# Altium PCB PCB1.PcbDoc
Units mm, origin at the board's own origin, x right, y up, seen from the top; angles counter-clockwise.
Board outline 152.4 x 101.6 mm, 2 copper layers (Top Layer, Bottom Layer); 89 components, 62 nets, 374 pads, 50 vias.
Unrouted connection lines stored in the file: 221.
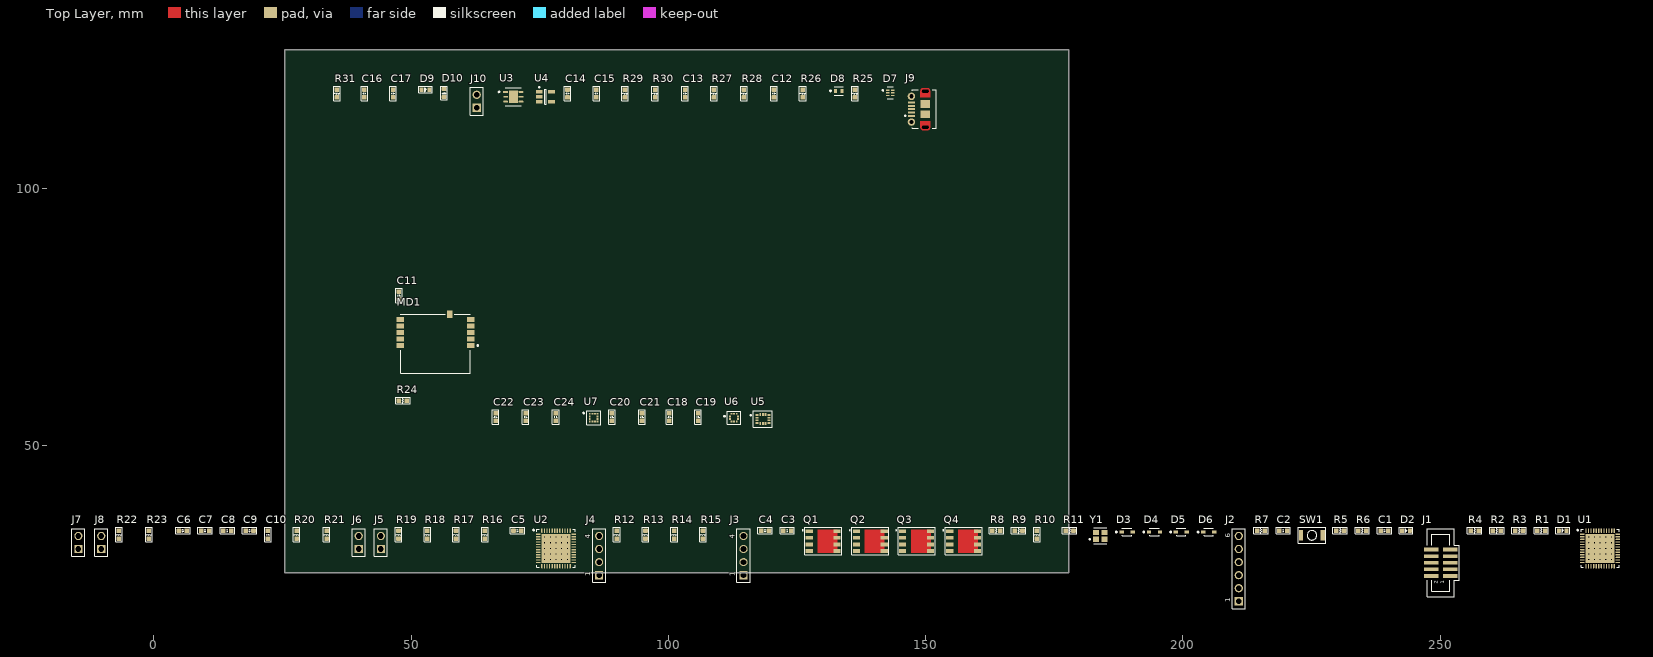
[diagram p0: Top Layer view]
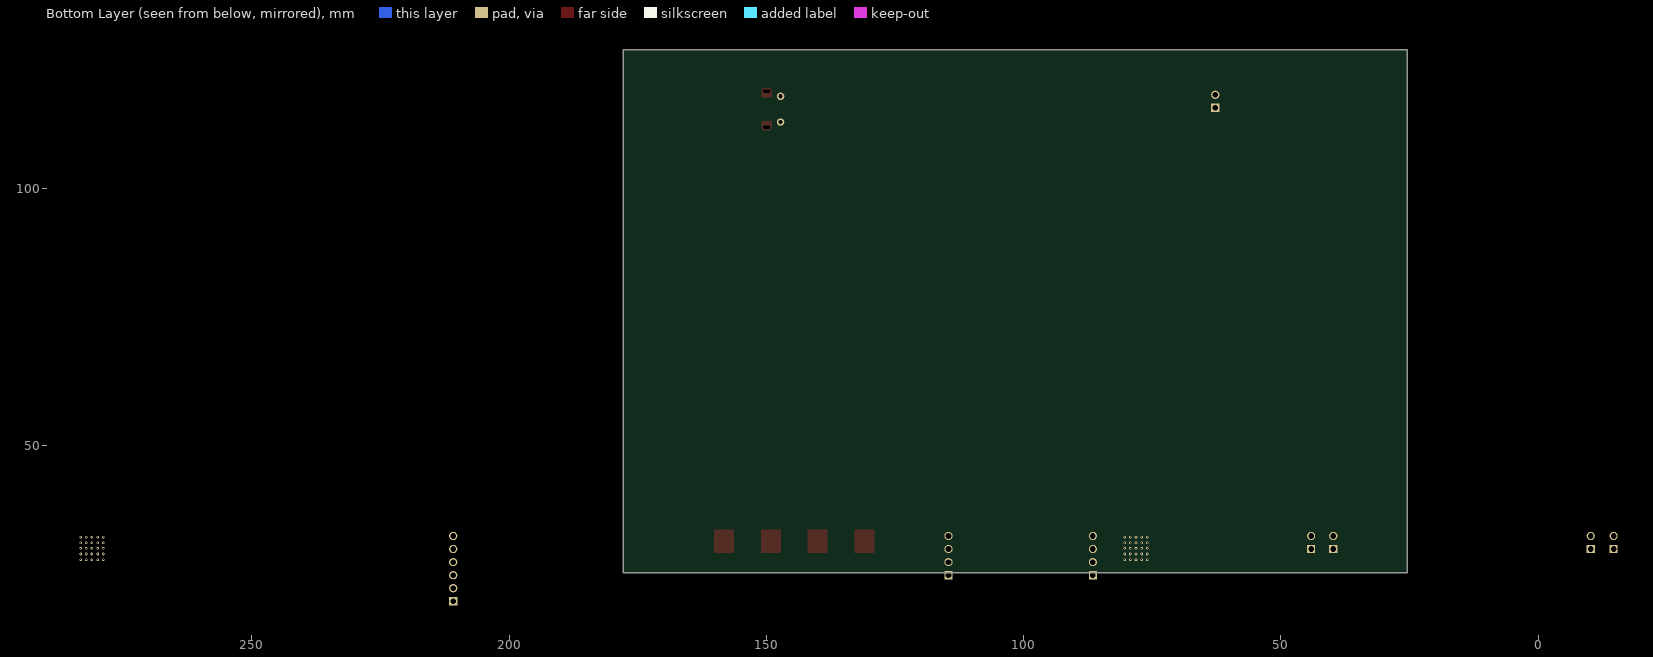
[diagram p1: Bottom Layer view, seen from below]

## Layer stack, top to bottom
Top Solder: solder mask 0.0102, Solder Resist, Dk 3.5
Top Layer: signal copper 0.0356
Dielectric 1: dielectric 0.32, FR-4, Dk 4.8
Bottom Layer: signal copper 0.0356
Bottom Solder: solder mask 0.0102, Solder Resist, Dk 3.5

## Board outline
25.4,25.4 177.8,25.4 177.8,127 25.4,127

## Design rules (kind name [scope] priority, off if disabled: settings)
Clearance [All] p1: gap=0.254 ignorepadtopadclearanceinfootprint=FALSE except(0: Arc-Hole Track-Hole SMDPad-Hole THPad-Hole Via-Hole Fill-Hole Poly-Hole Region-Hole Text-Hole)
PolygonConnect [All] p1: connectstyle=Relief reliefconductorwidth=0.254 reliefentries=4 polygonreliefangle="90 Angle" airgapwidth=0.254
RoomDefinition USB_BAT [InComponentClass('USB_BAT')] p1: confinementstyle=ConfineIn formatcopy=TRUE lockcomponents=FALSE outline 34.671,107.975 152.781,107.975 152.781,122.707 34.671,122.707
RoomDefinition SPBTLE-RF_BlueTooth_Module [InComponentClass('SPBTLE-RF_BlueTooth_Module')] p2: confinementstyle=ConfineIn formatcopy=TRUE lockcomponents=FALSE outline 63.373,57.912 63.373,81.788 44.196,81.788 44.196,57.912
RoomDefinition Sensor [InComponentClass('Sensor')] p3: confinementstyle=ConfineIn formatcopy=TRUE lockcomponents=FALSE outline 65.532,53.213 120.65,53.213 120.65,59.817 65.532,59.817
RoomDefinition Main_Sheet [InComponentClass('Main_Sheet')] p4: confinementstyle=ConfineIn formatcopy=TRUE lockcomponents=FALSE outline 0,17.907 301.752,17.907 301.752,36.957 0,36.957
RoutingVias [All] p1: holewidth=0.711 width=1.27 viastyle="Through Hole" minholewidth=0.711 minwidth=1.27 maxholewidth=0.711 maxwidth=1.27
SolderMaskExpansion [All] p1: expansion=0.102 istentingtop=FALSE
Width [All] p1: maxlimit=0.254 minlimit=0.254 preferedwidth=0.254
30 further rules are at their usual default settings.

## Classes and differential pairs
component class USB_BAT: C12 C13 C14 C15 C16 C17 D7 D8 D9 D10 J9 J10 R25 R26 R27 R28 R29 R30 R31 U3 U4
component class SPBTLE-RF_BlueTooth_Module: C11 MD1 R24
component class Sensor: C18 C19 C20 C21 C22 C23 C24 U5 U6 U7
component class Main_Sheet: C1 C2 C3 C4 C5 C6 C7 C8 C9 C10 D1 D2 D3 D4 D5 D6 J1 J2 J3 J4 J5 J6 J7 J8 Q1 Q2 Q3 Q4 R1 R2 R3 R4 R5 R6 R7 R8 R9 R10 R11 R12 R13 R14 R15 R16 R17 R18 R19 R20 R21 R22 R23 SW1 U1 U2 Y1

## Components (designator, comment, footprint, x,y, rotation, side; value= is the part's Value field where it differs from the comment)
C1 "Ceramic/1608" "Generic 1608 Ceramic" 239.186,33.528 r0 top value=100nF
C2 "Ceramic/1608" "Generic 1608 Ceramic" 219.501,33.528 r0 top value=100nF
C3 "Ceramic/1608" "Generic 1608 Ceramic" 123.108,33.528 r0 top value=15pF
C4 "Ceramic/1608" "Generic 1608 Ceramic" 118.79,33.528 r0 top value=15pF
C5 "Ceramic/1608" "Generic 1608 Ceramic" 70.657,33.528 r0 top value=4.7uF
C6 "Ceramic/1608" "Generic 1608 Ceramic" 5.633,33.528 r0 top value=100nF
C7 "Ceramic/1608" "Generic 1608 Ceramic" 9.951,33.528 r0 top value=100nF
C8 "Ceramic/1608" "Generic 1608 Ceramic" 14.269,33.528 r0 top value=100nF
C9 "Ceramic/1608" "Generic 1608 Ceramic" 18.587,33.528 r0 top value=100nF
C10 "Ceramic/1608" "Generic 1608 Ceramic" 22.143,32.766 r90 top value=1uF
C11 "Ceramic/1608" "Generic 1608 Ceramic" 47.625,79.248 r90 top value=1uF
C12 "Ceramic/1608" "Generic 1608 Ceramic" 120.523,118.516 r90 top value=100nF
C13 "Ceramic/1608" "Generic 1608 Ceramic" 103.251,118.516 r90 top value=4.7nF
C14 "Ceramic/1608" "Generic 1608 Ceramic" 80.391,118.516 r90 top value=1uF
C15 "Ceramic/1608" "Generic 1608 Ceramic" 85.979,118.516 r90 top value=100nF
C16 "Ceramic/1608" "Generic 1608 Ceramic" 40.894,118.516 r90 top value=100nF
C17 "Ceramic/1608" "Generic 1608 Ceramic" 46.482,118.516 r90 top value=100nF
C18 "Ceramic/1608" "Generic 1608 Ceramic" 100.203,55.626 r90 top value=1uF
C19 "Ceramic/1608" "Generic 1608 Ceramic" 105.791,55.626 r90 top value=100nF
C20 "Ceramic/1608" "Generic 1608 Ceramic" 89.027,55.626 r90 top value=1uF
C21 "Ceramic/1608" "Generic 1608 Ceramic" 94.869,55.626 r90 top value=100nF
C22 "Ceramic/1608" "Generic 1608 Ceramic" 66.421,55.626 r90 top value=1uF
C23 "Ceramic/1608" "Generic 1608 Ceramic" 72.263,55.626 r90 top value=100nF
C24 "Ceramic/1608" "Generic 1608 Ceramic" 78.105,55.626 r90 top value=100nF
D1 "Generic 1608 LED BLUE" "Generic 1608 LED BLUE-Footprint-1" 273.857,33.528 r0 top
D2 "Generic 1608 LED BLUE" "Generic 1608 LED BLUE-Footprint-1" 243.377,33.528 r0 top
D3 "BAT60JFILM" FP-BAT60JFILM-MFG 189.148,33.274 r0 top
D4 "BAT60JFILM" FP-BAT60JFILM-MFG 194.482,33.274 r0 top
D5 "BAT60JFILM" FP-BAT60JFILM-MFG 199.689,33.274 r0 top
D6 "BAT60JFILM" FP-BAT60JFILM-MFG 205.023,33.274 r0 top
D7 "USBULC6-2M6" FP-QFN_1_45x1_00_6L-MFG 143.129,118.643 r0 top value=0.65pF
D8 "ESDA7P60-1U1M" FP-1610-MFG 133.096,119.024 r0 top
D9 "Generic 1608 LED BLUE" "Generic 1608 LED BLUE-Footprint-1" 52.832,119.278 r0 top
D10 "Generic 1608 LED BLUE" "Generic 1608 LED BLUE-Footprint-1" 56.388,118.643 r90 top
J1 "SWD" 3220-10-0300-00-Footprint-1 250.108,27.305 r90 top
J2 "FC_SIGNAL" 61300611121 210.865,26.162 r90 top
J3 "I2C" 61300411121 114.599,28.702 r90 top
J4 "USART" 61300411121 86.532,28.702 r90 top
J5 "61300211121" 61300211121 44.114,31.242 r90 top
J6 "61300211121" 61300211121 39.796,31.242 r90 top
J7 "61300211121" 61300211121 -14.687,31.242 r90 top
J8 "61300211121" 61300211121 -10.242,31.242 r90 top
J9 "105017-0001" USB-MICRO-B_V 148.59,115.468 r90 top
J10 "61300211121 / Battery Connector" 61300211121 62.738,116.992 r90 top
MD1 "SPBTLE-RF0TR" FP-SPBTLE-RF0TR-MFG 54.737,69.85 r180 top
Q1 "CSD17573Q5B" CSD16342Q5A-Footprint-1 130.093,31.496 r0 top
Q2 "CSD17573Q5B" CSD16342Q5A-Footprint-1 139.237,31.496 r0 top
Q3 "CSD17573Q5B" CSD16342Q5A-Footprint-1 148.254,31.496 r0 top
Q4 "CSD17573Q5B" CSD16342Q5A-Footprint-1 157.398,31.496 r0 top
R1 "Resistor/1608" "Resistor 1608-Footprint" 269.666,33.528 r0 top value=10k
R2 "Resistor/1608" "Resistor 1608-Footprint" 261.03,33.528 r0 top value=10k
R3 "Resistor/1608" "Resistor 1608-Footprint" 265.348,33.528 r0 top value=100k
R4 "Resistor/1608" "Resistor 1608-Footprint" 256.712,33.528 r0 top value=220
R5 "Resistor/1608" "Resistor 1608-Footprint" 230.55,33.528 r0 top value=220
R6 "Resistor/1608" "Resistor 1608-Footprint" 234.868,33.528 r0 top value=20k
R7 "Resistor/1608" "Resistor 1608-Footprint" 215.183,33.528 r0 top value=10k
R8 "Resistor/1608" "Resistor 1608-Footprint" 163.748,33.528 r0 top value=100
R9 "Resistor/1608" "Resistor 1608-Footprint" 168.066,33.528 r0 top value=100
R10 "Resistor/1608" "Resistor 1608-Footprint" 171.622,32.766 r90 top value=100
R11 "Resistor/1608" "Resistor 1608-Footprint" 177.972,33.528 r0 top value=100
R12 "Resistor/1608" "Resistor 1608-Footprint" 89.961,32.766 r90 top value=10k
R13 "Resistor/1608" "Resistor 1608-Footprint" 95.549,32.766 r90 top value=10k
R14 "Resistor/1608" "Resistor 1608-Footprint" 101.137,32.766 r90 top value=10k
R15 "Resistor/1608" "Resistor 1608-Footprint" 106.725,32.766 r90 top value=10k
R16 "Resistor/1608" "Resistor 1608-Footprint" 64.307,32.766 r90 top value=0
R17 "Resistor/1608" "Resistor 1608-Footprint" 58.719,32.766 r90 top value=0
R18 "Resistor/1608" "Resistor 1608-Footprint" 53.131,32.766 r90 top value=0
R19 "Resistor/1608" "Resistor 1608-Footprint" 47.543,32.766 r90 top value=0
R20 "Resistor/1608" "Resistor 1608-Footprint" 27.731,32.766 r90 top value=0
R21 "Resistor/1608" "Resistor 1608-Footprint" 33.573,32.766 r90 top value=0
R22 "Resistor/1608" "Resistor 1608-Footprint" -6.813,32.766 r90 top value=0
R23 "Resistor/1608" "Resistor 1608-Footprint" -0.971,32.766 r90 top value=0
R24 "Resistor/1608" "Resistor 1608-Footprint" 48.387,58.801 r180 top value=47k
R25 "Resistor/1608" "Resistor 1608-Footprint" 136.271,118.516 r90 top value=0
R26 "Resistor/1608" "Resistor 1608-Footprint" 126.111,118.516 r90 top value=100k
R27 "Resistor/1608" "Resistor 1608-Footprint" 108.839,118.516 r90 top value=100k
R28 "Resistor/1608" "Resistor 1608-Footprint" 114.681,118.516 r90 top value=1M
R29 "Resistor/1608" "Resistor 1608-Footprint" 91.567,118.516 r90 top value=130
R30 "Resistor/1608" "Resistor 1608-Footprint" 97.409,118.516 r90 top value=130
R31 "Resistor/1608" "Resistor 1608-Footprint" 35.56,118.516 r90 top value=5.1k
SW1 "CTT-1135" CTT-1135-Footprint-1 225.089,32.639 r0 top
U1 "STM32F401CCU6" STM-UFQFPN48_N 281.096,30.099 r0 top
U2 "STM32F401CCU6 POWER" STM-UFQFPN48_N 78.15,30.099 r0 top
U3 "STBC08PMR" FP-DFN6-7946637-IPC_A 69.85,117.881 r0 top
U4 "LD39015M33R" SOT23-5L_M 76.073,117.881 r0 top
U5 "LSM6DSLTR" FP-LGA-14L-DM00249496-MFG 118.364,55.245 r0 top
U6 "LPS22HBTR" FP-HLGA-10L-8479831-0 112.776,55.499 r0 top
U7 "LIS2MDLTR" FP-LGA-12-DM00170568-MFG 85.471,55.499 r0 top
Y1 "NX2520SA-16MHZ-EXS00A-CS05116" FP-NX2520SA-MFG 183.941,32.512 r0 top

## Footprints (in the part's own frame and the unit in brackets; to place one, negate y for a bottom-side part, rotate by r counter-clockwise, add the part's x,y. Pads: shape width x height; smd on the part's side, far side on the other; paste and mask are expansions set on the pad)
3220-10-0300-00-Footprint-1 [mm]
  rect 0.76x2.8 smd: 1(-2.54,-1.85) 2(-2.54,1.85) 3(-1.27,-1.85) 4(-1.27,1.85) 5(0,-1.85) 6(0,1.85) 7(1.27,-1.85) 8(1.27,1.85) 9(2.54,-1.85) 10(2.54,1.85)
  silkscreen extent -6.58,-3.66 6.58,2.63, body extent -6.35,-2.76 6.35,2.74, height 5.21
61300211121 [mm] "Pin Header, pitch 2.54 mm, THT, Vertical, single row, 2p"
  rect 1.6x1.6 hole 1.1: 1(-1.27,0)
  round 1.6 hole 1.1: 2(1.27,0)
  silkscreen extent -2.69,-1.27 2.69,1.27, body extent -2.54,-1.27 2.54,1.27, height 8.57
61300411121 [mm] "Pin Header, pitch 2.54 mm, THT, Vertical, single row, 4p"
  rect 1.6x1.6 hole 1.1: 1(-3.81,0)
  round 1.6 hole 1.1: 2(-1.27,0) 3(1.27,0) 4(3.81,0)
  silkscreen extent -5.23,-1.27 5.23,1.27, body extent -5.08,-1.27 5.08,1.27, height 8.57
61300611121 [mm] "Pin Header, pitch 2.54 mm, THT, Vertical, single row, 6p"
  rect 1.6x1.6 hole 1.1: 1(-6.35,0)
  round 1.6 hole 1.1: 2(-3.81,0) 3(-1.27,0) 4(1.27,0) 5(3.81,0) 6(6.35,0)
  silkscreen extent -7.77,-1.27 7.77,1.27, body extent -7.62,-1.27 7.62,1.27, height 8.57
CSD16342Q5A-Footprint-1 [mm]
  rect 1.372x0.71 smd paste-0.673: 1(-2.712,1.905) 2(-2.712,0.635) 3(-2.712,-0.635) 4(-2.712,-1.905) 5(2.712,-1.905) 6(2.712,-0.635) 7(2.712,0.635) 8(2.712,1.905)
  Top Layer region: 2.765,2.26 2.765,-2.26 -1.085,-2.26 -1.085,2.26
  silkscreen extent -4.05,-2.68 3.62,2.68, body extent -3,-2.5 3,2.5, height 1.06
CTT-1135-Footprint-1 [mm]
  rect 0.8x2 smd: 1(-2.1,-0.012) 2(2.1,0.012)
  silkscreen extent -2.68,-1.55 2.68,1.55, body extent -2.4,-1.45 2.4,1.45, height 2
FP-1610-MFG [mm]
  rect 0.55x0.8 smd paste-1000 mask+0: 1(-0.625,0) 2(0.625,0)
  silkscreen extent -1.72,-0.82 0.85,0.82, body extent -1,-0.65 1,0.65, height 0.25
FP-BAT60JFILM-MFG [mm]
  rect 0.86x0.54 smd paste+0 mask+0: 1(-1.07,0) 2(1.07,0)
  silkscreen extent -2.2,-0.72 0.9,0.72, body extent -1.6,-0.82 1.6,0.82, height 0.25
FP-DFN6-7946637-IPC_A [mm]
  rect 0.931x0.381 smd paste+0 mask+0: 1(-1.491,0.95)
  rrect100% 0.931x0.381 smd paste+0 mask+0: 2(-1.491,0) 3(-1.491,-0.95) 4(1.491,-0.95) 5(1.491,0) 6(1.491,0.95)
  rect 1.75x2.5 smd paste-1000 mask+0: 7(0,0)
  silkscreen extent -2.88,-1.75 1.55,1.75
FP-HLGA-10L-8479831-0 [mm]
  rect 0.375x0.35 smd paste+0 mask+0: 1(-0.763,0.25) 2(-0.763,-0.25) 6(0.763,-0.25) 7(0.763,0.25)
  rect 0.35x0.375 smd paste+0 mask+0: 3(-0.5,-0.763) 4(0,-0.763) 5(0.5,-0.763) 8(0.5,0.763) 9(0,0.763) 10(-0.5,0.763)
  silkscreen extent -2,-1.3 1.3,1.3, body extent -1.55,-1.55 1.55,1.55, height 0.25
FP-LGA-12-DM00170568-MFG [mm]
  rect 0.375x0.35 smd paste+0 mask+0: 1(-0.763,0.75) 2(-0.763,0.25) 3(-0.763,-0.25) 4(-0.763,-0.75) 7(0.763,-0.75) 8(0.763,-0.25) 9(0.763,0.25) 10(0.763,0.75)
  rect 0.35x0.375 smd paste+0 mask+0: 5(-0.25,-0.763) 6(0.25,-0.763) 11(0.25,0.763) 12(-0.25,0.763)
  silkscreen extent -2.07,-1.35 1.35,1.35, body extent -1.55,-1.55 1.55,1.55, height 0.25
FP-LGA-14L-DM00249496-MFG [mm]
  rect 0.575x0.35 smd paste+0 mask+0: 1(-1.162,0.75) 2(-1.162,0.25) 3(-1.162,-0.25) 4(-1.162,-0.75) 8(1.162,-0.75) 9(1.162,-0.25) 10(1.162,0.25) 11(1.162,0.75)
  rect 0.35x0.575 smd paste+0 mask+0: 5(-0.5,-0.913) 6(0,-0.913) 7(0.5,-0.913) 12(0.5,0.913) 13(0,0.913) 14(-0.5,0.913)
  silkscreen extent -2.5,-1.58 1.83,1.58, body extent -2.05,-1.8 2.05,1.8, height 0.25
FP-NX2520SA-MFG [mm]
  rect 1.2x1 smd paste+0 mask+0: 1(-0.85,-0.65) 2(0.85,-0.65) 3(0.85,0.65) 4(-0.85,0.65)
  silkscreen extent -2.15,-1.56 1.3,1.58, body extent -1.55,-1.25 1.55,1.25, height 0.25
FP-QFN_1_45x1_00_6L-MFG [mm]
  rect 0.65x0.25 smd paste+0 mask+0: 1(-0.475,0.5) 2(-0.475,0) 3(-0.475,-0.5) 4(0.475,-0.5) 5(0.475,0) 6(0.475,0.5)
  silkscreen extent -1.57,-1.17 0.55,1.17, body extent -0.9,-0.87 0.9,0.87, height 0.25
FP-SPBTLE-RF0TR-MFG [mm]
  rect 1.4x1 smd paste+0 mask+0: 1(-6.85,0.33) 2(-6.85,-0.94) 3(-6.85,-2.21) 4(-6.85,-3.48) 5(-6.85,-4.75) 7(6.85,-4.75) 8(6.85,-3.48) 9(6.85,-2.21) 10(6.85,-0.94) 11(6.85,0.33)
  rect 1x1.4 smd paste+0 mask+0: 6(-2.75,-5.75)
  silkscreen extent -8.32,-5.75 6.75,5.75, body extent -7.65,-6.55 7.65,5.85, height 0.25
"Generic 1608 Ceramic" [mil]
  rrect25% 35x35 smd: 1(-30,0) 2(30,0)
  silkscreen extent -55,-25 55,25, body extent -33,-18 33,18, height 35
"Generic 1608 LED BLUE-Footprint-1" [mil]
  rrect25% 30x35 smd: 1(-30.98,0) 2(29.02,0)
  silkscreen extent -53,-25 52,25, body extent -33,-18 33,18, height 35
"Resistor 1608-Footprint" [mil]
  rrect25% 35x35 smd: 1(-30,0) 2(30,0)
  silkscreen extent -55,-25 55,25, body extent -33,-18 33,18, height 35
SOT23-5L_M [mm] "SOT23, 5-Leads, Body 2.9x1.6mm, Pitch 0.95mm, Lead Span 2.8mm, IPC Low Density"
  rect 1.3x0.7 smd: 1(-1.2,0.95) 2(-1.2,0) 3(-1.2,-0.95) 4(1.2,-0.95) 5(1.2,0.95)
  silkscreen extent -1.32,-1.5 0.15,1.97, body extent -0.87,-1.5 0.87,1.5, height 1.45
STM-UFQFPN48_N [mm] "QFN, 48-Leads, Body 7.1x7.1mm, Pitch 0.5mm, Thermal Pad 5.6x5.6mm, IPC Medium Density"
  oval 0.9x0.25 smd: 1(-3.45,2.75) 2(-3.45,2.25) 3(-3.45,1.75) 4(-3.45,1.25) 5(-3.45,0.75) 6(-3.45,0.25) 7(-3.45,-0.25) 8(-3.45,-0.75) 9(-3.45,-1.25) 10(-3.45,-1.75) 11(-3.45,-2.25) 12(-3.45,-2.75) 25(3.45,-2.75) 26(3.45,-2.25) 27(3.45,-1.75) 28(3.45,-1.25) 29(3.45,-0.75) 30(3.45,-0.25) 31(3.45,0.25) 32(3.45,0.75) 33(3.45,1.25) 34(3.45,1.75) 35(3.45,2.25) 36(3.45,2.75)
  oval 0.25x0.9 smd: 13(-2.75,-3.45) 14(-2.25,-3.45) 15(-1.75,-3.45) 16(-1.25,-3.45) 17(-0.75,-3.45) 18(-0.25,-3.45) 19(0.25,-3.45) 20(0.75,-3.45) 21(1.25,-3.45) 22(1.75,-3.45) 23(2.25,-3.45) 24(2.75,-3.45) 37(2.75,3.45) 38(2.25,3.45) 39(1.75,3.45) 40(1.25,3.45) 41(0.75,3.45) 42(0.25,3.45) 43(-0.25,3.45) 44(-0.75,3.45) 45(-1.25,3.45) 46(-1.75,3.45) 47(-2.25,3.45) 48(-2.75,3.45)
  rect 5.6x5.6 smd: 49(0,0)
  silkscreen extent -4.47,-3.7 3.7,3.7, body extent -3.55,-3.55 3.55,3.55, height 0.6
USB-MICRO-B_V [mm] "USB, MICRO B, Body 7.491x4.695 mm, Pitch 0.65 mm"
  rect 0.4x1.35 smd: 1(-1.3,1.35) 2(-0.65,1.35) 3(0,1.35) 4(0.65,1.35) 5(1.3,1.35)
  round 1.45 hole 0.85: 6(-2.5,1.35) 7(2.5,1.35)
  rrect50% 0x0 hole 0.6 slot 1.3 at 90 deg: 8(-3.5,-1.35) 11(3.5,-1.35)
  rect 1.5x1.9 smd: 9(-1,-1.35) 10(1,-1.35)
  Top Layer circle w0.5: c-3.6,-1.8 r0.25
  Top Layer circle w0.5: c-3.6,-0.9 r0.25
  Top Layer circle w0.5: c3.6,-1.8 r0.25
  Top Layer circle w0.5: c3.6,-0.9 r0.25
  Top Layer region: -3.6,-1.8 -3.6,-0.9 -4.1,-0.9 -4.1,-1.8
  Top Layer region: 3.6,-0.9 3.6,-1.8 4.1,-1.8 4.1,-0.9
  Top Layer region: 2.3,-0.4 2.3,-2.3 3.6,-2.3 3.6,-0.4
  Top Layer region: -2.3,-2.3 -2.3,-0.4 -3.6,-0.4 -3.6,-2.3
  silkscreen extent -3.75,-3.5 3.75,2.7, body extent -4.1,-3.9 4.1,1.5, height 2.67

## Part data
C1 C2 C3 C4 C5 C6 C7 C8 C9 C10 C11 C12 C14 C15 C16 C17 C18 C19 C20 C21 C22 C23 C24: library part CMP-002-0009-3, "Generic 1608 Ceramic Capacitor", Capacitor Type=Ceramic, Case/Package=1608, Mount=SMD, Pins=2, RoHS=Yes
C13: library part CMP-002-0009-3, "Generic 1608 Ceramic Capacitor / 50V", Capacitor Type=Ceramic, Case/Package=1608, Mount=SMD, Pins=2, RoHS=Yes
D1 D2 D9 D10: library part CMP-008-0003-2, "Generic 1608 LED <BLUE>"
D3 D4 D5 D6: library part CMP-12187-000028-1, "DIODE SCHOTTKY 10V 3A SOD323", Average Rectified Current=3A, Forward Voltage=580mV, Max Forward Surge Current (Ifsm)=5A, Max Operating Temperature=150°C, Max Repetitive Reverse Voltage (Vrrm)=10V, Max Reverse Leakage Current=7.5uA, Min Operating Temperature=-65°C, Package Quantity=1, Contact Plating=Tin, Current Rating=3A, Element Configuration=Single, Forward Current=3A, Height=1.07mm, Lead Free="Lead Free", Length=1.8mm, Max Reverse Voltage (DC)=10V, Max Surge Current=5A, Mount="Surface Mount", Number of Pins=2, Output Current=3A, Packaging="Tape and Reel", Peak Non-Repetitive Surge Current=5A, Peak Reverse Current=7.5uA, Polarity=Standard, Radiation Hardening=No, REACH SVHC="No SVHC", Voltage Rating (DC)=10V, Weight=0.01lb, Width=1.45mm
D7: library part CMP-12225-000002-1, "TVS DIODE 5V 17V 6UQFN", Breakdown Voltage=6V, Capacitance=0.65pF, Clamping Voltage=17V, Manufacturer=STMicroelectronics, Max Junction Temp=+150°C, Package=QFN_1.45x1.00_6L, Temperature="to +150°C", Automotive=No, Category=Diode, ComponentLink2Description=Datasheet, ComponentLink2URL=https://www.st.com/resource/en/datasheet/usbulc6-2m6.pdf, Device Class L1="Circuit Protection", Device Class L2="TVS Diodes", Device Class L3=unset, Digikey Description="TVS DIODE 5V 17V 6UQFN", Direction=Unidirectional, Height=0.65mm, Ipc Land Pattern Name=DFN145X100X57-6, Lead Free=Yes, Manufacturer Part Number=USBULC6-2M6, Mouser Description="ESD Suppressors ULTRA LG BANDWIDTH ESD PROTECTION", Number Of Channels=2, Octopart=https://octopart.com/usbulc6-2m6-stmicroelectronics-7979994, RoHS=TRUE, Standoff Height=0mm, Temperature Range High=+150°C
D8: library part CMP-12225-000013-1, "TVS DIODE 5V 11.6V 1610", Breakdown Voltage=6.4V, Clamping Voltage=10.2V, Manufacturer=STMicroelectronics, Max Junction Temp=+150°C, Package=1610, Peak Pulse Current=60A, Peak Pulse Power=700W, Reverse Standoff Voltage=5V, Temperature="-55°C to +150°C", Temperature Range Low=-55°C, Automotive=No, Category=Diode, ComponentLink2Description=Datasheet, ComponentLink2URL=http://www.st.com/content/ccc/resource/technical/document/datasheet/44/e9/26/44/42/ee/4f/e5/DM00139972.pdf/files/DM00139972.pdf/jcr:content/translations/en.DM00139972.pdf, Device Class L1="Circuit Protection", Device Class L2="TVS Diodes", Device Class L3=unset, Digikey Description="TVS DIODE 5V 11.6V 1610", Direction=Unidirectional, Height=0.65mm, Lead Free=Yes, Manufacturer Part Number=ESDA7P60-1U1M, Number Of Channels=1, Octopart=https://octopart.com/esda7p60-1u1m-stmicroelectronics-52112702, RoHS=TRUE, Standoff Height=0mm, Temperature Range High=+150°C
J1: library part CMP-ROOT-00062-1, "CONN HEADER SMD 10POS 1.27MM", Package Quantity=3200, Connector Type="Male Pin", Contact Plating=Gold, Mount="Surface Mount", Number of Positions=10, Number of Rows=2, Packaging=Tray, Pitch=0.05inch, RoHS=Yes, Row Spacing=0.05inch, Termination=Solder
J2: library part CMP-005-0062-1, "Pin Header WR-PHD, pitch 2.54 mm, THT, Vertical, single row, 6 pin", Contact Resistance="20 mOhm", Insulation Resistance=">1000 MOhm", Operating Temperature="-40 to 105 degC", Part Number=61300611121, Rated Current="3 A", Working Voltage="250 VAC", Component Name=61300611121, ComponentLink1Description=Manufacturer, ComponentLink1URL=http://www.we-online.de, ComponentLink2Description=Datasheet, ComponentLink2URL=http://katalog.we-online.de/em/datasheet/6130xx11121.pdf, Mounting Technology=THT, Orientation=Vertical, Pin Count=6, Pin Number=6, Pitch="2.54 mm", Published Date="Jan. 2018", Publisher="Wurth Elektronik", Row Number=Single
J3 J4: library part CMP-005-0056-1, "Pin Header WR-PHD, pitch 2.54 mm, THT, Vertical, single row, 4 pin", Contact Resistance="20 mOhm", Insulation Resistance=">1000 MOhm", Operating Temperature="-40 to 105 degC", Part Number=61300411121, Rated Current="3 A", Working Voltage="250 VAC", Component Name=61300411121, ComponentLink1Description=Manufacturer, ComponentLink1URL=http://www.we-online.de, ComponentLink2Description=Datasheet, ComponentLink2URL=http://katalog.we-online.de/em/datasheet/6130xx11121.pdf, Mounting Technology=THT, Orientation=Vertical, Pin Count=4, Pin Number=4, Pitch="2.54 mm", Published Date="Jan. 2018", Publisher="Wurth Elektronik", Row Number=Single
J5 J6 J7 J8: library part CMP-005-0052-1, "Pin Header WR-PHD, pitch 2.54 mm, THT, Vertical, single row, 2 pin", Contact Resistance="20 mOhm", Insulation Resistance=">1000 MOhm", Operating Temperature="-40 to 105 degC", Rated Current="3 A", Working Voltage="250 VAC", Component Name=61300211121, ComponentLink1Description=Manufacturer, ComponentLink1URL=http://www.we-online.de, ComponentLink2Description=Datasheet, ComponentLink2URL=http://katalog.we-online.de/em/datasheet/6130xx11121.pdf, Mounting Technology=THT, Orientation=Vertical, Part Number=61300211121, Pin Count=2, Pin Number=2, Pitch="2.54 mm", Published Date="Jan. 2018", Publisher="Wurth Elektronik", Row Number=Single
J9: library part CMP-2000-05827-1, "Micro-USB B Receptacle, Right Angle, Bottom Mount, Surface Mount, with Solder Tabs, -30 to 85 degC, 5-Pin USB, RoHS, Tape and Reel", Manufacturer=Molex, Package Description="5-Leads USB, Micro B, Body 7.5 x 5 mm, Pitch 0.65 mm", Package Reference=MICRO-B, Package Version="Rev. F, 12/2012", Standard Package=1, Voltage - Max=30V, 3D Model=105017-0001.stp, Catalog Drawings=1050170001, Category=Connectors,Interconnects, Circuits=5, Connector Type=USB-microB, Datasheet URL=http://www.molex.com/elqNow/elqRedir.htm?ref=http://www.molex.com/webdocs/datasheets/pdf/en-us/1050170001_IO_CONNECTORS.pdf, Datasheet Version=03/2016, Family=USB,DVI,HDMIConnectors, Featured Product=Micro-USBConnectorsUSBConnectors, Features=Shielded,SolderRetention, Gender=Receptacle, Ingress Protection=-, Manufacturer URL=http://www.molex.com/, Mating Products=WM17145-ND-CABLEMICROUSBBTOSTDA1.0MWM17147-ND-CABLEMICROUSBBTOSTDA2.0MWM17146-ND-CABLEMICROUSBBTOSTDA1.5M, Mounting Technology=SurfaceMount, Mounting Type=BoardCutout,SurfaceMount,RightAngle, Number of Contacts=5, Online Catalog=Molex-MicroUSB, Other Names=WM1399DKR, Package URL=http://www.molex.com/pdm_docs/sd/1050170001_sd.pdf, Packaging=Digi-Reel®, PCN Assembly/Origin=ResinSupplier21/Oct/2015, RoHS Information=1050170001CertofCompliance, Series=-, Specifications=-
J10: library part CMP-005-0052-1, "Pin Header WR-PHD, pitch 2.54 mm, THT, Vertical, single row, 2 pin", Contact Resistance="20 mOhm", Insulation Resistance=">1000 MOhm", Operating Temperature="-40 to 105 degC", Part Number=61300211121, Rated Current="3 A", Working Voltage="250 VAC", Component Name=61300211121, ComponentLink1Description=Manufacturer, ComponentLink1URL=http://www.we-online.de, ComponentLink2Description=Datasheet, ComponentLink2URL=http://katalog.we-online.de/em/datasheet/6130xx11121.pdf, Mounting Technology=THT, Orientation=Vertical, Pin Count=2, Pin Number=2, Pitch="2.54 mm", Published Date="Jan. 2018", Publisher="Wurth Elektronik", Row Number=Single
MD1: library part CMP-12160-000004-1, "MOD VLP BLUETOOTH REV V4.1", Manufacturer=STMicroelectronics, Max Frequency=2480MHz, Max Supply Voltage=3.6V, Min Supply Voltage=1.7V, Nominal Supply Current=0.186-14.49mA, Temperature="-40°C to +85°C", Temperature Range High=+85°C, Temperature Range Low=-40°C, Automotive=No, Category=UNK, ComponentLink2Description=Datasheet, ComponentLink2URL=https://www.st.com/resource/en/datasheet/spbtle-rf0.pdf, Device Class L1="Integrated Circuits (ICs)", Device Class L2="RF Semiconductors and Devices", Device Class L3=Transceivers, Digikey Description="MOD VLP BLUETOOTH REV V4.1", Height=2.2mm, Interface=SPI, Lead Free=Yes, Manufacturer Part Number=SPBTLE-RF0TR, Number Of Gpio=1, Octopart=https://octopart.com/spbtle-rf0tr-stmicroelectronics-87775406, Package=SPBTLE-RF0TR, RoHS=TRUE, Sensitivity=-88dBm
Q1 Q2 Q3 Q4: library part CMP-014-0005-2, "Trans MOSFET N-CH 30V 100A 8-Pin SON T/R", Continuous Drain Current (ID)=100A, Drain to Source Voltage (Vdss)=30V, Gate to Source Voltage (Vgs)=20V, Input Capacitance=9nF, Max Operating Temperature=150°C, Max Power Dissipation=3.2W, Min Operating Temperature=-55°C, Contact Plating="Nickel, Gold", Element Configuration=Single, Fall Time=7ns, Lead Free="Contains Lead", Mount="Surface Mount", Number of Pins=8, Packaging="Tape and Reel", Rds On Max=1mR, Rise Time=20ns, Turn-Off Delay Time=40ns, Turn-On Delay Time=6ns
R1 R2 R3 R4 R5 R6 R7 R8 R9 R10 R11 R12 R13 R14 R15 R16 R17 R18 R19 R20 R21 R22 R23 R24 R25 R26 R27 R28 R29 R30 R31: library part CMP-001-0018-2, "Generic 1608 Resistor", Case/Package=Bulk, Mount=SMD, Pins=2, RoHS=Yes
SW1: library part CMP-013-0003-1, "3.9x2.9x2.0 SMD  Tact switch", Case/Package=3.9x2.9x2.0, Mount=SMD, Pins=2, RoHS=Yes
U1: library part CMP-0243-00119-2, "ARM Cortex-M4 32-bit MCU+FPU, 105 DMIPS, 256 kB Flash, 64 kB Internal RAM, 36 I/Os, 48-pin UFQFPN, -40 to 85 degC, Tray", I/Os (High Current)=36, Manufacturer=STMicroelectronics, Operating Frequency(F) (Processor speed) (MHz)=84, Supply Voltage(Vcc) max (V)=3.6, Supply Voltage(Vcc) min (V)=1.8, ComponentLink1Description="Manufacturer URL", ComponentLink1URL=http://www.st.com/web/en/home.html, ComponentLink2Description=Datasheet, ComponentLink2URL=http://www.st.com/st-web-ui/static/active/en/resource/technical/document/data_brief/DM00071938.pdf, ComponentLink3Description="Package Specification", ComponentLink3URL=http://www.st.com/st-web-ui/static/active/en/resource/technical/document/data_brief/DM00071938.pdf, Core="ARM Cortex-M4", DatasheetVersion="Rev. 1", FLASH Size (Prog) (kB)=256, Internal RAM Size (kB)=64, Mounting Technology="Surface Mount", PackageDescription="48-Pin Ultra Thin Fine Pitch Quad Flat No-Lead, 7 x 7 x 0.6 mm Body, 0.5 mm Pitch, Exposed Pad", PackageReference=UFQFPN48, PackageVersion="Rev. 1, 04/2013", Packing=Tray, PartNumber=STM32F401CCU6
U2: library part CMP-0243-00119-2, "ARM Cortex-M4 32-bit MCU+FPU, 105 DMIPS, 256 kB Flash, 64 kB Internal RAM, 36 I/Os, 48-pin UFQFPN, -40 to 85 degC, Tray", I/Os (High Current)=36, Manufacturer=STMicroelectronics, Operating Frequency(F) (Processor speed) (MHz)=84, PartNumber=STM32F401CCU6, Supply Voltage(Vcc) max (V)=3.6, Supply Voltage(Vcc) min (V)=1.8, ComponentLink1Description="Manufacturer URL", ComponentLink1URL=http://www.st.com/web/en/home.html, ComponentLink2Description=Datasheet, ComponentLink2URL=http://www.st.com/st-web-ui/static/active/en/resource/technical/document/data_brief/DM00071938.pdf, ComponentLink3Description="Package Specification", ComponentLink3URL=http://www.st.com/st-web-ui/static/active/en/resource/technical/document/data_brief/DM00071938.pdf, Core="ARM Cortex-M4", DatasheetVersion="Rev. 1", FLASH Size (Prog) (kB)=256, Internal RAM Size (kB)=64, Mounting Technology="Surface Mount", PackageDescription="48-Pin Ultra Thin Fine Pitch Quad Flat No-Lead, 7 x 7 x 0.6 mm Body, 0.5 mm Pitch, Exposed Pad", PackageReference=UFQFPN48, PackageVersion="Rev. 1, 04/2013", Packing=Tray
U3: library part CMP-12147-000003-2, "IC BATT CHRGR LI-ION 800MA DFN6", Case/Package=DFN, Max Input Voltage=10V, Max Operating Temperature=85°C, Max Output Current=800mA, Max Output Voltage=4.242V, Max Supply Voltage=6.5V, Min Operating Temperature=-40°C, Min Output Voltage=4.158V, Min Supply Voltage=4.25V, Output Voltage=4.2V, Package Quantity=1, Height=0.95mm, Lead Free="Lead Free", Length=3.1mm, Mount="Surface Mount", Number Of Channels=1, Number of Pins=6, Output Current=800mA, Packaging="Tape and Reel", Radiation Hardening=No, Width=3.1mm
U4: library part CMP-0244-00351-1, "150 mA Low Quiescent Current Low Noise Voltage Regulator, 3.3V, 5-Pin SOT-23, Tape and Reel", ComponentLink1Description="Manufacturer URL", ComponentLink1URL=http://www.st.com, ComponentLink2Description=Datasheet, ComponentLink2URL=http://www.st.com/internet/com/TECHNICAL_RESOURCES/TECHNICAL_LITERATURE/DATASHEET/CD00173477.pdf, DatasheetVersion=1/02/2009, PackageDescription="5-Pin SOT-23 Package, 2.9 x 1.6 mm Body, 0.95 mm Pitch, 2.8 mm Lead Span", PackageReference=SOT23-5L, PackageVersion=1/01/2008
U5: library part CMP-2000-07467-2, "IMU ACCEL/GYRO I2C/SPI 14LGA", Manufacturer=STMicroelectronics, Max Supply Voltage=3.6V, Min Supply Voltage=1.62V, Operating Supply Current=0.29-0.65mA, Package=LGA-14L-DM00249496, Temperature="-40°C to +85°C", Temperature Range High=+85°C, Temperature Range Low=-40°C, Accel Range=2/4/8/16g, Automotive=No, Category=IC, ComponentLink2Description=Datasheet, ComponentLink2URL=https://www.st.com/resource/en/datasheet/lsm6dsl.pdf, Device Class L1=Sensors, Device Class L2="Motion Sensors", Device Class L3="Inertial Measurement Units (IMUs)", Digikey Description="IMU ACCEL/GYRO I2C/SPI 14LGA", Footprint Url=https://www.st.com/resource/en/technical_note/cd00134799.pdf, Gyro Range=125/250/500/1000/2000°/s, Height=0.86mm, Lead Free=Yes, Manufacturer Part Number=LSM6DSLTR, Mouser Description="iNEMO inertial module: always-on 3D accelerometer and 3D gyroscope", Octopart=https://octopart.com/lsm6dsltr-stmicroelectronics-66358193, Resolution=16bits, RoHS=TRUE, Sensor Output=I2C,SPI, Sensor Type=Temperature,Accelerometer,Gyroscope
U6: library part CMP-12182-000004-1, "MEMS NANO PRESSURE SENSOR: 260-1", Manufacturer=STMicroelectronics, Max Supply Voltage=3.6V, Min Supply Voltage=1.7V, Operating Supply Current=3-12uA, Package=HLGA-10L-8479831, Temperature="-40°C to +85°C", Temperature Range High=+85°C, Temperature Range Low=-40°C, Automotive=No, Category=IC, ComponentLink2Description=Datasheet, ComponentLink2URL=https://www.st.com/resource/en/datasheet/lps22hb.pdf, Device Class L1=Sensors, Device Class L2="Pressure Sensors", Device Class L3=unset, Digikey Description="MEMS NANO PRESSURE SENSOR: 260-1", Footprint Url=https://www.st.com/content/ccc/resource/technical/document/technical_note/73/17/9c/16/dd/96/4a/01/CD00134799.pdf/files/CD00134799.pdf/jcr:content/translations/en.CD00134799.pdf, Height=0.8mm, Lead Free=Yes, Manufacturer Part Number=LPS22HBTR, Octopart=https://octopart.com/lps22hbtr-stmicroelectronics-51851131, Port Style="No Port", RoHS=TRUE, Sensor Output=I2C,SPI
U7: library part CMP-12173-000002-1, "SENSOR MR I2C/SPI 12LGA", Manufacturer=STMicroelectronics, Max Supply Voltage=3.6V, Min Supply Voltage=1.71V, Operating Supply Current=50-200uA, Package=LGA-12-DM00170568, Temperature="-40°C to +85°C", Temperature Range High=+85°C, Temperature Range Low=-40°C, Automotive=No, Category=IC, ComponentLink2Description=Datasheet, ComponentLink2URL=https://www.st.com/resource/en/datasheet/lis2mdl.pdf, Device Class L1=Sensors, Device Class L2="Magnetic Sensors", Device Class L3=unset, Digikey Description="SENSOR MR I2C/SPI 12LGA", Height=0.7mm, Lead Free=Yes, Manufacturer Part Number=LIS2MDLTR, Octopart=https://octopart.com/lis2mdltr-stmicroelectronics-81117311, RoHS=TRUE, Sensing Method=Magnetic, Sensor Output=I2C,SPI
Y1: library part CMP-2000-05279-2, "CRYSTAL 16.0000MHZ 12PF SMD", Case/Package=SMD/SMT, ESR (Equivalent Series Resistance)=80R, Frequency=16MHz, Frequency Stability=25ppm, Frequency Tolerance=15ppm, Load Capacitance=12pF, Max Operating Temperature=85°C, Min Operating Temperature=-40°C, Package Quantity=3000, Height=0.022inch, Length=0.098inch, Mount="Surface Mount", Number of Pins=4, Packaging="Tape and Reel", Series Resistance=80R, Width=0.079inch

## Via types
v1: diameter 0.5, hole 0.2, Top Layer to Bottom Layer, 50 vias

## Nets (pads, with @x,y where several pads share a name; then routed paths per layer and width w, separated by ;. In a path a pad name is that pad's centre, name@x,y a point inside that pad or via, vN(x,y) a via of type N, cw(c..) or ccw(c..) an arc to the next point about the centre after c; other vN are vias at no path point)
BLE_CS: MD1.10 U1.18
BLE_IRQ: MD1.4 R24.2 U1.14
BLE_RSTN: MD1.11 U1.20
BOOT0: C1.1 C2.1 C3.1 C4.1 C5.1 C6.1 C6.2 C7.1 C7.2 C8.1 C8.2 C9.1 C9.2 C10.1 C10.2 C11.1 C11.2 C12.1 C13.1 C14.1 C15.1 C16.1 C17.1 C18.1 C18.2 C19.1 C19.2 C20.1 C20.2 C21.1 C21.2 C22.1 C22.2 C23.1 C23.2 C24.2 D7.2 D8.2 J1.1 J1.3 J1.5 J1.7 J1.9 J2.6 J3.1 J3.4 J4.1 J4.2 J9.5 J10.2 MD1.5 MD1.6 Q1.1 Q1.2 Q1.3 Q2.1 Q2.2 Q2.3 Q3.1 Q3.2 Q3.3 Q4.1 Q4.2 Q4.3 R1.2 R3.2 R4.2 R5.2 R6.1 R7.1 R12.1 R13.1 R14.1 R15.1 R24.1 R25.1 R25.2 R27.1 R28.1 R31.1 SW1.1 U1.44 U2.1 U2.8 U2.9 U2.23 U2.24 U2.35 U2.36 U2.47 U2.48 U2.49 U3.4 U3.7 U4.2 U4.5 U5.5 U5.6 U5.7 U5.8 U6.1 U6.3 U6.8 U6.9 U6.10 U7.6 U7.8 U7.9 U7.10 Y1.2 Y1.4
  other v1: 75.95,27.899 77.05,27.899 78.15,27.899 79.25,27.899 80.35,27.899 75.95,28.999 77.05,28.999 78.15,28.999 79.25,28.999 80.35,28.999 75.95,30.099 77.05,30.099 78.15,30.099 79.25,30.099 80.35,30.099 75.95,31.199 77.05,31.199 78.15,31.199 79.25,31.199 80.35,31.199 75.95,32.299 77.05,32.299 78.15,32.299 79.25,32.299 80.35,32.299
CLK: MD1.7 U1.15
DM: D7.4 J9.2
DP: D7.6 J9.3
I2C2_SCL: J3.3 U1.21
I2C2_SDA: J3.2 U1.39
LIS2MDL_CS: U1.25 U7.3
LPS22HB_CS: U1.2 U6.6
LSM6DS33_CS: U1.29 U5.12
MISO: MD1.8 U1.16
MOSI: MD1.9 U1.17
MOTOR1: R8.1 R18.1 U1.42
"MOTOR1 -": D3.2 Q1.5 Q1.6 Q1.7 Q1.8 R16.1
MOTOR2: R9.1 R19.1 U1.43
"MOTOR2 -": D4.2 Q2.5 Q2.6 Q2.7 Q2.8 R17.1
MOTOR3: R10.1 R22.1 U1.45
"MOTOR3 -": D5.2 Q3.5 Q3.6 Q3.7 Q3.8 R20.1
MOTOR4: R11.1 R23.1 U1.46
"MOTOR4 -": D6.2 Q4.5 Q4.6 Q4.7 Q4.8 R21.1
NetC3_2: C3.2 U1.5 Y1.1
NetC4_2: C4.2 U1.6 Y1.3
NetC13_2: C13.2 J9.6 J9.7 J9.8 J9.9 J9.10 J9.11 R28.2
NetC24_1: C24.1 U7.5
NetD1_1: D1.1 R4.1
NetD1_2: D1.2 U1.40
NetD2_1: D2.1 R5.1
NetD2_2: D2.2 U1.41
NetD9_1: D9.1 R29.1
NetD9_2: D9.2 U3.3
NetD10_1: D10.1 R30.1
NetD10_2: D10.2 U3.2
NetJ5_2: J5.2 R16.2 R18.2
NetJ6_2: J6.2 R17.2 R19.2
NetJ7_2: J7.2 R20.2 R22.2
NetJ8_2: J8.2 R21.2 R23.2
NetQ1_2: Q1.4 R8.2 R12.2
NetQ2_2: Q2.4 R9.2 R13.2
NetQ3_2: Q3.4 R10.2 R14.2
NetQ4_2: Q4.4 R11.2 R15.2
NetR31_2: R31.2 U3.5
NRST: C2.2 J1.10 R3.1 SW1.2 U1.7
S2_CLK: U1.26 U5.13 U6.2 U7.1
S2_SDA: U1.28 U5.14 U6.4 U7.4
S2_SDO: U1.27
SWCLK: J1.4 R7.2 U1.37
SWDD: J1.2 R1.1 U1.34
TIM2_CH1: J2.2 U1.10
TIM2_CH2: J2.3 U1.11
TIM2_CH3: J2.4 U1.12
TIM2_CH4: J2.5 U1.13
USART1_RX: J4.3 U1.31
USART1_TX: J4.4 U1.30
USB_DM: D7.3 U1.32
USB_DP: D7.1 U1.33
USB_Monitor: R26.1 R27.2 U1.3
V_USB: C12.2 C14.2 C15.2 D7.5 D8.1 J9.1 R26.2 R29.2 R30.2 U3.6
VBAT+: C16.2 C17.2 D3.1 D4.1 D5.1 D6.1 J2.1 J5.1 J6.1 J7.1 J8.1 J10.1 R2.2 U3.1 U4.1 U4.3
VBAT_SENSE: C1.2 R2.1 R6.2 U1.19
VCAP1: C5.2 U1.22
pads on no net: J1.6 J1.8 J9.4 MD1.1 MD1.2 MD1.3 U1.1 U1.4 U1.8 U1.9 U1.23 U1.24 U1.35 U1.36 U1.38 U1.47 U1.48 U1.49 U2.2 U2.3 U2.4 U2.5 U2.6 U2.7 U2.10 U2.11 U2.12 U2.13 U2.14 U2.15 U2.16 U2.17 U2.18 U2.19 U2.20 U2.21 U2.22 U2.25 U2.26 U2.27 U2.28 U2.29 U2.30 U2.31 U2.32 U2.33 U2.34 U2.37 U2.38 U2.39 U2.40 U2.41 U2.42 U2.43 U2.44 U2.45 U2.46 U4.4 U5.1 U5.2 U5.3 U5.4 U5.9 U5.10 U5.11 U6.5 U6.7 U7.2 U7.7 U7.11 U7.12
copper on no net:
  other v1: 278.896,27.899 279.996,27.899 281.096,27.899 282.196,27.899 283.296,27.899 278.896,28.999 279.996,28.999 281.096,28.999 282.196,28.999 283.296,28.999 278.896,30.099 279.996,30.099 281.096,30.099 282.196,30.099 283.296,30.099 278.896,31.199 279.996,31.199 281.096,31.199 282.196,31.199 283.296,31.199 278.896,32.299 279.996,32.299 281.096,32.299 282.196,32.299 283.296,32.299

## Text inside footprints (layer, text, board x,y; h text height)
J1: Top Overlay "2" at 249.87,23.177 h1.26 r90; Top Overlay "1" at 251.14,23.257 h1.26 r90
J2: Top Overlay "6" at 209.165,32.162 h1 r90; Top Overlay "1" at 209.165,19.622 h1 r90
J3: Top Overlay "4" at 112.899,32.002 h1 r90; Top Overlay "1" at 112.899,24.702 h1 r90
J4: Top Overlay "4" at 84.832,32.002 h1 r90; Top Overlay "1" at 84.832,24.702 h1 r90
J9: Mechanical 1 "PCB EDGE" at 151.49,108.268 h0.3 r90